# Altium PCB Secondary Protection.PcbDoc
Units mil, origin at the board's own origin, x right, y up, seen from the top; angles counter-clockwise.
Board outline 2500 x 2250 mil, 2 copper layers (Top Layer, Bottom Layer); 87 components, 69 nets, 264 pads, 67 vias.
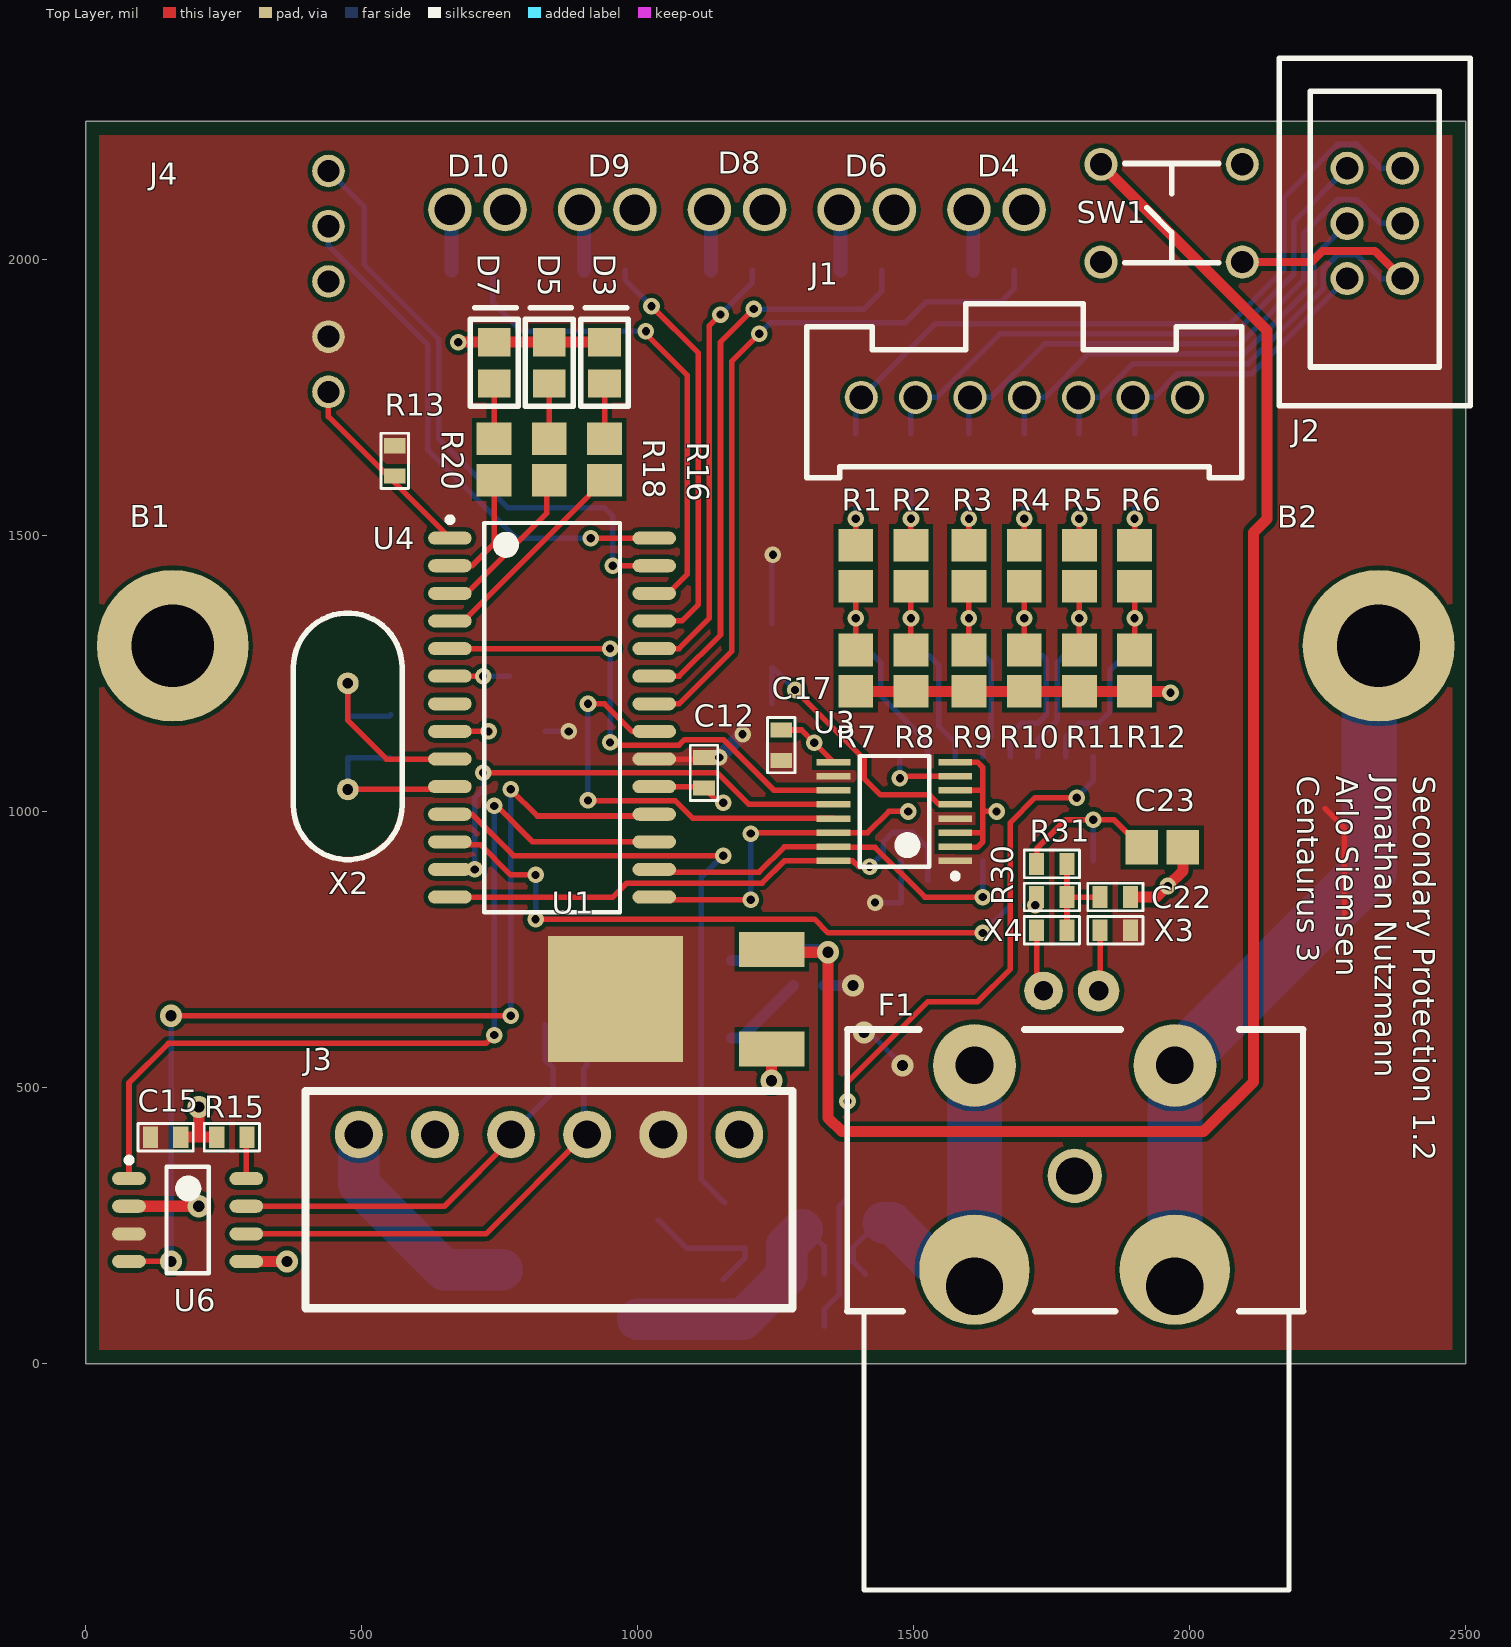
[diagram p0: Top Layer view]
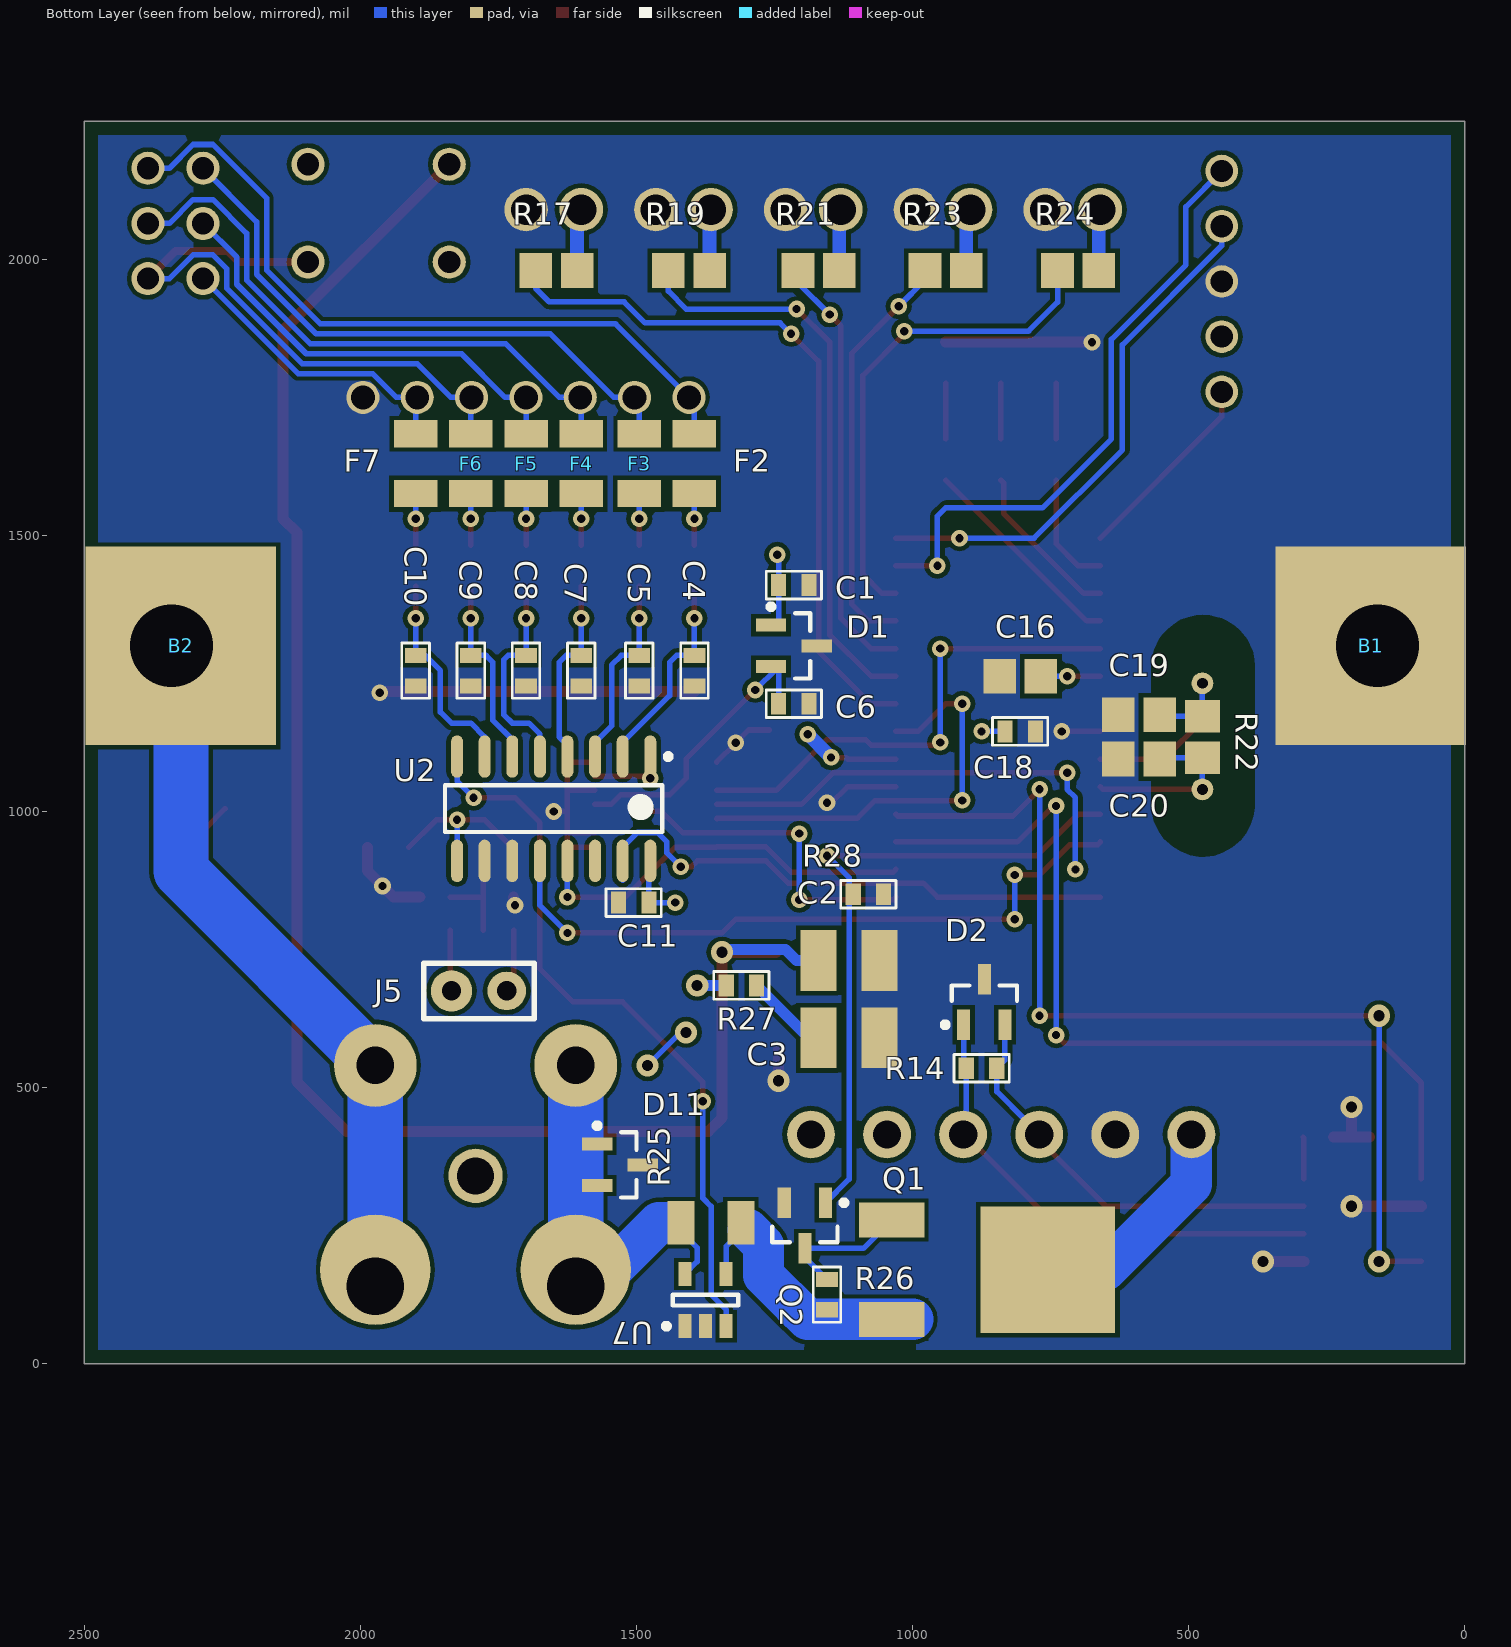
[diagram p1: Bottom Layer view, seen from below]
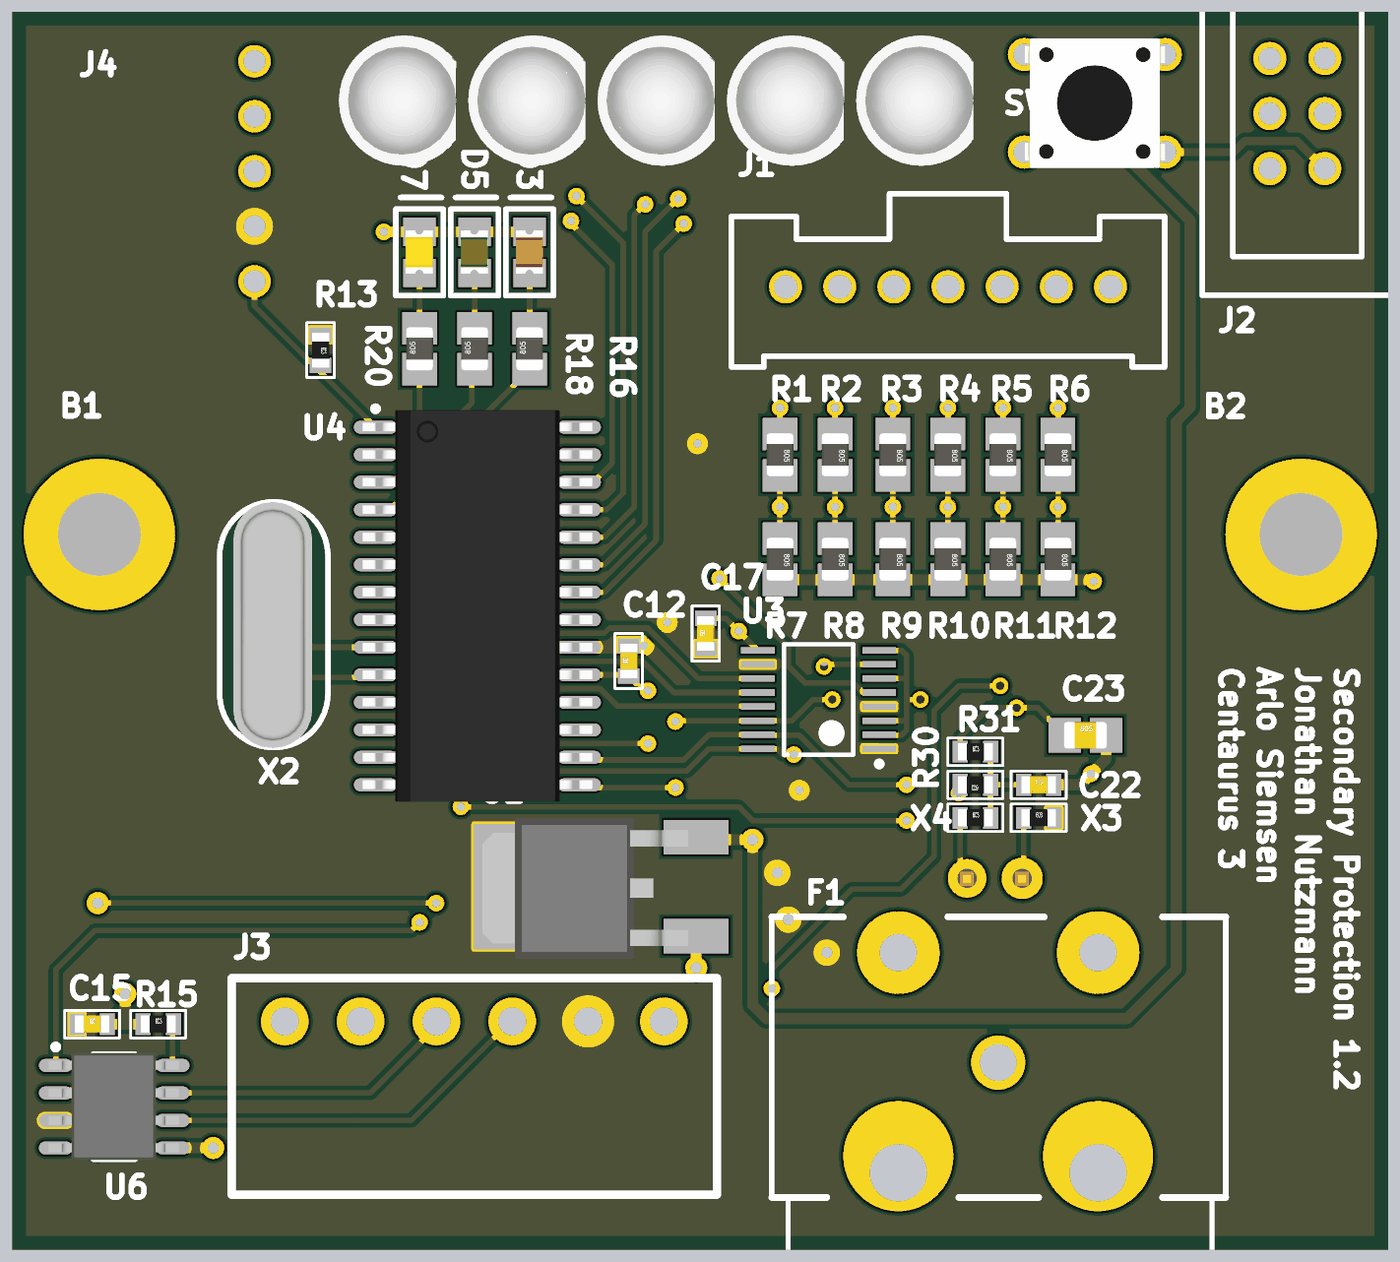
[diagram p2: 3D render of the assembled board from above, using the file's embedded part models]
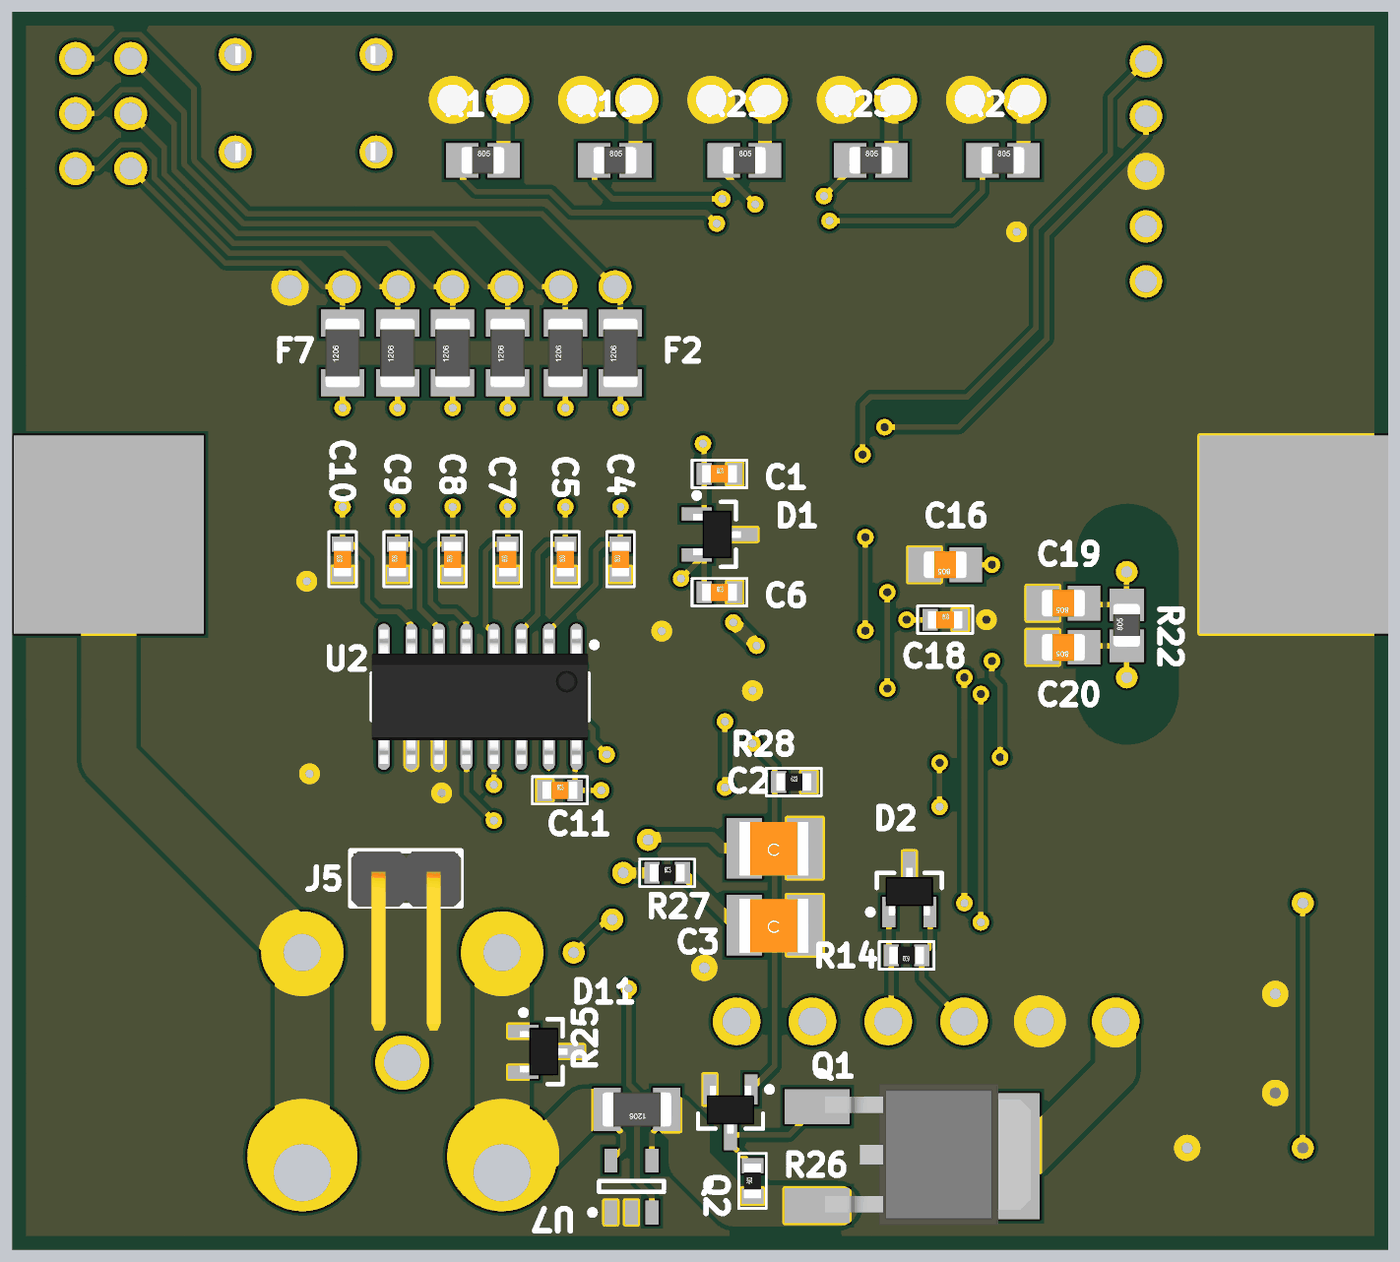
[diagram p3: 3D render of the assembled board from below, using the file's embedded part models]

## Layer stack, top to bottom
Top Layer: signal copper 1.4
Dielectric: dielectric 12.6, FR-4, Dk 4.8
Bottom Layer: signal copper 1.4

## Board outline
0,0 0,2250 2500,2250 2500,0

## Design rules (kind name [scope] priority, off if disabled: settings)
Clearance [All] p1: gap=8
HoleSize [All] p1: absolutevalues=TRUE maxlimit=500 minlimit=15 maxpercent=80.000 minpercent=20.000
MinimumSolderMaskSliver [All] p1: minsoldermaskwidth=5
PolygonConnect [All] p1: connectstyle=Direct reliefconductorwidth=10 reliefentries=4 polygonreliefangle="90 Angle"
RoutingVias [All] p1: holewidth=15 width=30 viastyle="Through Hole" minholewidth=15 minwidth=30 maxholewidth=28 maxwidth=50
SilkToSilkClearance [All] p1: silktosilkclearance=1
SilkscreenOverComponentPads [All] p1: minsilkscreentomaskgap=1
SolderMaskExpansion [All] p1: expansion=4
Width [All] p1: maxlimit=1000 minlimit=10 preferedwidth=10
24 further rules are at their usual default settings.

## Components (designator, comment, footprint, x,y, rotation, side; value= is the part's Value field where it differs from the comment)
B1 "J_C3_BATTERY_PAD" BatteryPad 170,1300 r0 top
B2 "J_C3_BATTERY_PAD" BatteryPad 2325,1300 r0 top
C1 "CAP 0603" 0603_cap 1215,1410 r180 bottom
C2 "CAP 1210" 1210_Capacitor 1115,730 r180 bottom
C3 "CAP 1210" 1210_Capacitor 1115,590 r180 bottom
C4 "CAP 0603" 0603_cap 1395,1255 r90 bottom
C5 "CAP 0603" 0603_cap 1495,1255 r90 bottom
C6 "CAP 0603" 0603_cap 1215,1195 r180 bottom
C7 "CAP 0603" 0603_cap 1600,1255 r90 bottom
C8 "CAP 0603" 0603_cap 1700,1255 r90 bottom
C9 "CAP 0603" 0603_cap 1800,1255 r90 bottom
C10 "CAP 0603" 0603_cap 1900,1255 r90 bottom
C11 "CAP 0603" 0603_cap 1505,835 r180 bottom
C12 "CAP 0603" 0603_cap 1120,1070 r90 top
C15 "CAP 0603" 0603_cap 145,410 r0 top
C16 "CAP 0805" 0805_Capacitor 805,1245 r0 bottom
C17 "CAP 0603" 0603_cap 1260,1120 r90 top
C18 "CAP 0603" 0603_cap 805,1145 r180 bottom
C19 "CAP 0805" 0805_Capacitor 590,1175 r0 bottom
C20 "CAP 0805" 0805_Capacitor 590,1095 r0 bottom
C22 "CAP 0603" 0603_cap 1865,845 r0 top
C23 "CAP 0805" 0805_Capacitor 1950,935 r0 top
D1 "IC LDO V-REF 2.048V SOT23-3" SOT-23 1215,1300 r180 bottom
D2 "CAN TVS" SOT-23 870,655 r90 bottom
D3 "D_LED_0805_RED" 0805P_RED 940,1812.6 r270 top
D4 "D_LED_5MM_GREEN" LED_5mm_GREEN 1650,2090 r0 top
D5 "D_LED_0805_GREEN" 0805P_Green 840,1812.6 r270 top
D6 "D_LED_5MM_GREEN" LED_5mm_GREEN 1415,2090 r0 top
D7 "D_LED_0805_YELLOW" 0805P_YELLOW 740,1812.6 r270 top
D8 "D_LED_5MM_GREEN" LED_5mm_GREEN 1180,2090 r0 top
D9 "D_LED_5MM_GREEN" LED_5mm_GREEN 945,2090 r0 top
D10 "D_LED_5MM_GREEN" LED_5mm_GREEN 710,2090 r0 top
D11 "D_AZ23C36-TP" SOT-23 1530,360 r180 bottom
F1 "PWR - ATO 20A" "FUSEHOLDER - AutoBlade" 1610,540 r0 top
F2 "250 mA" 1206_RESISTOR 1395,1630 r90 bottom
F3 "250 mA" 1206_RESISTOR 1495,1630 r90 bottom
F4 "250 mA" 1206_RESISTOR 1600,1630 r90 bottom
F5 "250 mA" 1206_RESISTOR 1700,1630 r90 bottom
F6 "250 mA" 1206_RESISTOR 1800,1630 r90 bottom
F7 "250 mA" 1206_RESISTOR 1900,1630 r90 bottom
J1 "DF1E 5-pin Male Header" DF1EC-7P-2.5DSA 1405,1750 r0 top
J2 "J_3x2_0.1" 6PIN_2_.100IN 2385,2165 r270 top
J3 "J_1844252" 1844252 495,415 r0 top
J4 "J_PICKIT2_5" "CONN FEMALE 5POS .100\" R/A GOLD" 440,1760 r180 top
J5 "J_Thermistor_Connector" SIP_HEADER_2 1785,675 r270 bottom
Q1 "MOSFET P-CH 30V 25A TO-252" DPAK 755,170 r0 bottom
Q2 "RK7002BT116" SOT-23 1195,250 r270 bottom
R1 "RES 0805" 0805_Resistor 1395,1445 r270 top
R2 "RES 0805" 0805_Resistor 1495,1445 r270 top
R3 "RES 0805" 0805_Resistor 1600,1445 r270 top
R4 "RES 0805" 0805_Resistor 1700,1445 r270 top
R5 "RES 0805" 0805_Resistor 1800,1445 r270 top
R6 "RES 0805" 0805_Resistor 1900,1445 r270 top
R7 "RES 0805" 0805_Resistor 1395,1255 r270 top
R8 "RES 0805" 0805_Resistor 1495,1255 r270 top
R9 "RES 0805" 0805_Resistor 1600,1255 r270 top
R10 "RES 0805" 0805_Resistor 1700,1255 r270 top
R11 "RES 0805" 0805_Resistor 1800,1255 r270 top
R12 "RES 0805" 0805_Resistor 1900,1255 r270 top
R13 "RES 0603" 0603_res 560,1635 r270 top
R14 "RES 0603" 0603_res 875,535 r0 bottom
R15 "RES 0603" 0603_res 265,410 r0 top
R16 "R_0805_620_1%" 0805_Resistor 940,1637.6 r90 top
R17 "R_0805_620_1%" 0805_Resistor 1645,1980 r180 bottom
R18 "R_0805_620_1%" 0805_Resistor 840,1637.6 r90 top
R19 "R_0805_620_1%" 0805_Resistor 1405,1980 r180 bottom
R20 "R_0805_620_1%" 0805_Resistor 740,1637.6 r90 top
R21 "R_0805_620_1%" 0805_Resistor 1170,1980 r180 bottom
R22 "RES 0805" 0805_Resistor 475,1135 r90 bottom
R23 "R_0805_620_1%" 0805_Resistor 940,1980 r180 bottom
R24 "R_0805_620_1%" 0805_Resistor 700,1980 r180 bottom
R25 "R_0805_0.01_1%" 1206_Resistor 1365,255 r0 bottom
R26 "RES 0603" 0603_res 1155,125 r90 bottom
R27 "RES 0603" 0603_res 1310,685 r180 bottom
R28 "RES 0603" 0603_res 1080,850 r180 bottom
R30 "RES 0603" 0603_res 1750,845 r180 top
R31 "RES 0603" 0603_res 1750,905 r0 top
SW1 "SW_TACT_SWITCH_6x6" TACT_SWITCH_6x6 2095,1995 r90 top
U1 "MC7805BDTG" DPAK 960,660 r0 top
U2 "U_MCP6S28-I/SL" SOIC127P600X175-16N 1650,1005 r270 bottom
U3 "U_ADS1146IPW" ADS1146IPW 1465,1000 r180 top
U4 "PIC18F25K80" SOIC127P1030X265-28N 845,1170 r0 top
U6 "U_MAX3051" SOIC127P600X175-8N 185,260 r0 top
U7 "U_ MAX9938F" SOT95P280X145-5N 1375,115 r90 bottom
X2 "HC49" HC-49 475,1040 r90 top
X3 "0603" 0603_res 1865,785 r0 top
X4 "0603" 0603_res 1750,785 r0 top

## Footprints (in the part's own frame and the unit in brackets; to place one, negate y for a bottom-side part, rotate by r counter-clockwise, add the part's x,y. Pads: shape width x height; smd on the part's side, far side on the other; paste and mask are expansions set on the pad)
6PIN_2_.100IN [mil]
  round 60 hole 40.16: 1(0,0) 2(0,-100) 3(100,0) 4(100,-100) 5(200,0) 6(200,-100)
  silkscreen extent -200,-223 430,123
0603_cap [mm]
  rect 0.7x1 smd: 1(-0.7,0) 2(0.7,0)
  silkscreen extent -1.27,-0.64 1.27,0.64, body extent -0.8,-0.4 0.8,0.4, height 0.3
0603_res [mm]
  rect 0.7x1 smd: 1(-0.7,0) 2(0.7,0)
  silkscreen extent -1.27,-0.64 1.27,0.64, body extent -0.8,-0.4 0.8,0.4, height 0.3
0805_Capacitor [mm] "0805 Capacitor"
  rect 1.5x1.6 smd: 1(-0.95,0) 2(0.95,0)
  body extent -1,-0.63 1,0.62, height 0.76
0805_Resistor [mm] "0805 Resistor"
  rect 1.5x1.6 smd: 1(-0.95,0) 2(0.95,0)
  body extent -1,-0.62 1,0.63, height 0.78
0805P_Green [mm] "Chip Capacitor; Body 2.0 x 1.2 mm (LxW typ)"
  rect 1.3x1.5 smd: 1(-0.95,0) 2(0.95,0)
  silkscreen extent -2.54,-1.1 2,1.1, body extent -1.02,-0.64 0.99,0.61, height 0.79
0805P_RED [mm] "Chip Capacitor; Body 2.0 x 1.2 mm (LxW typ)"
  rect 1.3x1.5 smd: 1(-0.95,0) 2(0.95,0)
  silkscreen extent -2.54,-1.1 2,1.1, body extent -1.02,-0.64 0.99,0.61, height 0.79
0805P_YELLOW [mm] "Chip Capacitor; Body 2.0 x 1.2 mm (LxW typ)"
  rect 1.3x1.5 smd: 1(-0.95,0) 2(0.95,0)
  silkscreen extent -2.54,-1.1 2,1.1, body extent -1.02,-0.64 0.99,0.61, height 0.79
1206_RESISTOR [mm] "1206 Resistor/Capacitor"
  rect 1.25x2 smd: 1(-1.375,0) 2(1.375,0)
  body extent -1.6,-0.8 1.6,0.8, height 1
1206_Resistor [mm] "1206 Resistor/Capacitor"
  rect 1.25x2 smd: 1(-1.375,0) 2(1.375,0)
  body extent -1.6,-0.8 1.6,0.8, height 1
1210_Capacitor [mil] "1210 Capacitor"
  rect 65x110 smd: 1(-55,0) 2(55,0)
  body extent -84,-54 82,52, height 36
1844252 [mm]
  round 2.2 hole 1.3: 1(0,0) 2(3.5,0) 3(7,0) 4(10.5,0) 5(14,0) 6(17.5,0)
  silkscreen extent -2.45,-8 19.95,2
ADS1146IPW [mm] "TSOP, 16-Leads, Body 5.1x4.5mm (max), Pitch 0.65mm, IPC Medium Density"
  rect 1.55x0.3 smd: 1(-2.8,2.275) 2(-2.8,1.625) 3(-2.8,0.975) 4(-2.8,0.325) 5(-2.8,-0.325) 6(-2.8,-0.975) 7(-2.8,-1.625) 8(-2.8,-2.275) 9(2.8,-2.275) 10(2.8,-1.625) 11(2.8,-0.975) 12(2.8,-0.325) 13(2.8,0.325) 14(2.8,0.975) 15(2.8,1.625) 16(2.8,2.275)
  silkscreen extent -2.93,-2.55 1.6,3.1, body extent -2.25,-2.55 2.25,2.55, height 1.2
BatteryPad [mil]
  rect 345x360 smd far side: 1(0,0)
"CONN FEMALE 5POS .100\" R/A GOLD" [mm] "PICKIT2 Programmer Header"
  round 1.5 hole 1.02: +5(0,-2.54) GND(0,-5.08) PGC(0,-10.16) PGD(0,-7.62) RST(0,0)
  body extent 1.6,-11.7 10.1,1.5, height 2.54
DF1EC-7P-2.5DSA [mil] "7-pin DF1E connector straight"
  round 60 hole 43.31: 1(0,0) 2(98.43,0) 3(196.85,0) 4(295.28,0) 5(393.7,0) 6(492.13,0) 7(590.55,0)
  silkscreen extent -98,-146 689,169, body extent -98,-146 689,169, height 425
DPAK [mm]
  rect 6.2x5.8 smd: 1(0,0)
  rect 3x1.6 smd: 2(7.18,2.285) 3(7.18,-2.285)
  body extent -2.69,-3.33 6.81,3.17, height 2.3
"FUSEHOLDER - AutoBlade" [mil]
  round 200 hole 104 copper offset 0,30: 1(0,-400) 2(363,-400)
  round 150 hole 68: 1(0,0) 2(363,0)
  round 98.43 hole 67 unplated: 3(181.5,-200)
  silkscreen extent -230,-950 595,65
HC-49 [mm]
  round 1 hole 0.5: 1(0,0) 2(4.88,0)
  Top Layer pour cut-out: -2.591,1.499 -2.388,1.727 -2.235,1.854 -1.981,2.057 -1.727,2.184 -1.448,2.311 -1.067,2.388 -0.787,2.413 5.766,2.413 6.172,2.337 6.579,2.21 6.909,2.032 7.239,1.778 7.595,1.372 7.849,0.914 7.976,0.533 8.026,0.127 8.026,-0.178 7.95,-0.559 7.772,-0.991 7.569,-1.346 7.188,-1.778 6.858,-2.007 6.375,-2.235 6.02,-2.311 5.588,-2.362 -0.686,-2.362 -1.016,-2.337 -1.27,-2.286 -1.502,-2.216 -1.753,-2.108 -2.007,-1.981 -2.21,-1.829 -2.438,-1.6 -2.642,-1.346 -2.87,-1.016 -2.997,-0.66 -3.073,-0.279 -3.099,0.025 -3.073,0.33 -3.023,0.584 -2.946,0.889 -2.819,1.118 -2.718,1.295
  Bottom Layer pour cut-out: 7.518,1.499 7.315,1.727 7.163,1.854 6.909,2.057 6.655,2.184 6.375,2.311 5.994,2.388 5.715,2.413 -0.838,2.413 -1.245,2.337 -1.651,2.21 -1.981,2.032 -2.311,1.778 -2.667,1.372 -2.921,0.914 -3.048,0.533 -3.099,0.127 -3.099,-0.178 -3.023,-0.559 -2.845,-0.991 -2.642,-1.346 -2.261,-1.778 -1.93,-2.007 -1.448,-2.235 -1.092,-2.311 -0.66,-2.362 5.613,-2.362 5.944,-2.337 6.198,-2.286 6.43,-2.216 6.68,-2.108 6.934,-1.981 7.137,-1.829 7.366,-1.6 7.569,-1.346 7.798,-1.016 7.925,-0.66 8.001,-0.279 8.026,0.025 8.001,0.33 7.95,0.584 7.874,0.889 7.747,1.118 7.645,1.295
  silkscreen extent -3.23,-2.5 8.11,2.5, body extent -3.25,-1.78 8.1,1.87, height 3.3
LED_5mm_GREEN [mm]
  round 2 hole 1.4: 1(-1.27,0) 2(1.27,0)
  body extent -2.96,-3.05 2.46,2.97, height 8.76
SIP_HEADER_2 [mil] "2 Pin SIP Header"
  round 70 hole 35: 1(0,50)
  round 75 hole 35: 2(0,-50)
  silkscreen extent -50,-100 50,100, body extent -49,-99 277,101, height 170
SOIC127P600X175-8N [mm] "SOIC, 8-Leads, Body 4.9x3.9mm (max), Pitch 1.27mm, IPC Medium Density"
  oval 1.55x0.6 smd: 1(-2.7,1.905) 2(-2.7,0.635) 3(-2.7,-0.635) 4(-2.7,-1.905) 5(2.7,-1.905) 6(2.7,-0.635) 7(2.7,0.635) 8(2.7,1.905)
  silkscreen extent -2.82,-2.45 0.97,2.88, body extent -3.02,-2.46 2.98,2.48, height 1.55
SOIC127P600X175-16N [mm] "SOIC, 16-Leads, Body 10.0x4.0mm (max), Pitch 1.27mm, IPC Medium Density"
  oval 1.95x0.55 smd: 1(-2.4,4.445) 2(-2.4,3.175) 3(-2.4,1.905) 4(-2.4,0.635) 5(-2.4,-0.635) 6(-2.4,-1.905) 7(-2.4,-3.175) 8(-2.4,-4.445) 9(2.4,-4.445) 10(2.4,-3.175) 11(2.4,-1.905) 12(2.4,-0.635) 13(2.4,0.635) 14(2.4,1.905) 15(2.4,3.175) 16(2.4,4.445)
  silkscreen extent -2.52,-5 1.07,5.39, body extent -3.1,-5 3.1,5, height 1.7
SOIC127P1030X265-28N [mm] "SOIC, 28-Leads, Body 17.9x7.5mm (max), Pitch 1.27mm, IPC Medium Density"
  oval 2x0.6 smd: 1(-4.7,8.255) 2(-4.7,6.985) 3(-4.7,5.715) 4(-4.7,4.445) 5(-4.7,3.175) 6(-4.7,1.905) 7(-4.7,0.635) 8(-4.7,-0.635) 9(-4.7,-1.905) 10(-4.7,-3.175) 11(-4.7,-4.445) 12(-4.7,-5.715) 13(-4.7,-6.985) 14(-4.7,-8.255) 15(4.7,-8.255) 16(4.7,-6.985) 17(4.7,-5.715) 18(4.7,-4.445) 19(4.7,-3.175) 20(4.7,-1.905) 21(4.7,-0.635) 22(4.7,0.635) 23(4.7,1.905) 24(4.7,3.175) 25(4.7,4.445) 26(4.7,5.715) 27(4.7,6.985) 28(4.7,8.255)
  silkscreen extent -4.82,-8.95 3.13,9.23, body extent -5.3,-9.05 5.3,9.05, height 2.57
SOT95P280X145-5N [mm] "SOT23, 5-Leads, Body 3.0x3.0mm (max), Pitch 0.95mm, IPC Medium Density"
  rect 1.1x0.6 smd: 1(-1.2,0.95) 2(-1.2,0) 3(-1.2,-0.95) 4(1.2,-0.95) 5(1.2,0.95)
  silkscreen extent -1.32,-1.5 0.25,1.93, body extent -0.87,-1.5 0.87,1.5, height 1.45
SOT-23 [mm] "SOT23, 3-Leads, Body 3.0x2.7mm (max), Pitch 0.95mm, IPC Medium Density"
  rect 1.4x0.6 smd: 1(-1.05,0.95) 2(-1.05,-0.95) 3(1.05,0)
  silkscreen extent -1.18,-1.5 0.76,1.92, body extent -1.21,-1.1 0.99,1.1, height 1.1
TACT_SWITCH_6x6 [mil]
  round 60 hole 40: 1(0,0) 2(177.17,255.91) 3(177.17,0) 4(0,255.91)
  silkscreen extent -1,43 179,213, body extent -29,0 207,255, height 169

## Part data
C1: library part C_0603, "CAP CER 1UF 16V 10% X7R 0603"
C2 C3: library part C_1210, "CAP CER 22UF 10V 10% X7R 1210"
C4 C5 C7 C8 C9 C10: library part C_0603, "CAP CER 1UF 50V 10% X7R 0603"
C6 C11 C12 C15 C17 C18 C22: library part C_0603, "CAP CER 0.1UF 50V 10% X7R 0603"
C16 C23: library part C_0805, "CAP CER 10UF 10V 10% X5R 0805"
C19 C20: library part C_0805, "CAP CER 22PF 50V 5% NP0 0805"
D1: library part D_REF3320AIDBZT
D2: library part D_NUP2105, "IC CAN BUS PROTECTOR DUAL SOT23"
D3: "LED 2X1.2MM 625NM RD WTR CLR SMD 0805"
D4 D6 D8 D9 D10: "LED 5MM GREEN CLEAR 527NM 15DEG"
D5: "LED 2X1.2MM 568NM GN WTR CLR SMD 0805"
D7: "LED 2X1.2MM 588NM YW WTR CLR SMD 0805"
D11: "DIODE ZENER DUAL 36V SOT-23"
F1: library part "FUSEHOLDER AutoBlade", "FUSE HOLDER ATO AUTO BLADE"
F2 F3 F4 F5 F6 F7: library part F_250mA_1206, "FUSE 250 mA 1206"
J1: library part DF1E_7_S, "7-pin Hirose"
J2: "3 x 2 0.1\" Header"
J3: library part J_1803316, "CONN HEADER RT ANG 6POS 3.5MM"
J4: "PICKIT2 PROG HEADER"
J5: "Thermistor Connector"
Q1: library part "Q_AOD417_ P-CH_-30A_-25A_DPAK", "MOSFET P-CH 30V 25A TO-252 DPAK"
Q2: library part Q_N_60V_250MA_SOT23, "MOSFET N-CH 60V 250MA SOT-23"
R1 R2 R3 R4 R5 R6: library part R_0805, "RESISTOR, 1/10W, 226K, 0.5%, 0805"
R7 R8 R9 R10 R11 R12: library part R_0805, "RESISTOR, 1/10W, 20K, 0.5%, 0805"
R13 R15 R31: library part R_0603, "RESISTOR, 1/10W, 10K, 1%, 0603"
R14: library part R_0603, "RESISTOR, 1/10W, 3.3K, 1%, 0603"
R16 R18 R20: "RESISTOR, 1/8W, 620, 1%, 0805"
R17 R19 R21 R23 R24: "RES 620 OHM 1/8W 1% 0805 SMD"
R22: library part R_0805, "RESISTOR, 1/8W, 1M, 1%, 0805"
R25: "RES CURRENT SENSE .005 OHM 1W 1%"
R26 R28: library part R_0603, "RESISTOR, 1/10W, 500K, 1%, 0603"
R27: library part R_0603
R30: library part R_0603, "RESISTOR, 1/10W, 8.2K, 1%, 0603"
SW1: "SWITCH TACT 6MM BLACK 160GF"
U1: library part U_AP1117D33G_1, "IC REG LDO BIPO 1A 3.3V TO252-3"
U2: "IC PGA 8CH R-R I/O 16SOIC"
U3: "IC ADC 16BIT SRL 2KSPS 16TSSOP"
U4: library part U_PIC18F25K80, "MCU PIC 32KB FLASH 28SOIC"
U6: "IC TXRX CAN 1MBPS 8-SOIC 3.3V"
U7: "IC AMP CURRENT SENSE SOT23-5"
X2: library part X_HC49, "CRYSTAL 8.00 MHZ 20PF 49US"
X3 X4: library part X_0603_FERRITE, "FERRITE CHIP 2A 300 OHM SMD"

## Free pads (board coordinates)
  round 275 hole 150: 0(157.99,1300) 1(2342.01,1300)

## Via types
v1: diameter 30, hole 15, Top Layer to Bottom Layer, 57 vias
v2: diameter 40, hole 20, Top Layer to Bottom Layer, 10 vias

## Nets (pads, with @x,y where several pads share a name; then routed paths per layer and width w, separated by ;. In a path a pad name is that pad's centre, name@x,y a point inside that pad or via, vN(x,y) a via of type N, cw(c..) or ccw(c..) an arc to the next point about the centre after c; other vN are vias at no path point)
2CELL: F6.2 J1.5 J2.5 SW1.1 | length 1159.1
  Top Layer w10: J1.5@1778.7,1750 J1.5@1800,1728.7
  Top Layer w15: SW1.1 2220,1995 2240,2015 2335,2015 J2.5
  Bottom Layer w10: J1.5@1798.7,1763.7 J1.5 1836.31,1750 1897.31,1811 2105.54,1811 2242,1947.46 2242,1982.81 2267.19,2008 2302.81,2008 2345.81,1965 J2.5 ; F6.2 J1.5@1800,1748.7
+2.048: C6.1 D1.2 U3.5 | length 520.6
  Top Layer w10: v1(1285,1220) 1410,1095 1410,1060 1440,1030 1528.82,1030 1546.02,1012.8 U3.5
  Bottom Layer w10: C6.1 1242.56,1260 1245,1260 v1(1285,1220)
+3.3V: C1.1 C11.2 C12.2 C15.1 C17.1 C18.1 D1.1 J3.5 J4.+5 R13.1 R27.1 U1.1 U2.16 U3.1 U3.4 U3.10 U4.20 U6.3 X3.2 | length 839.7
  Top Layer w10: U4.20 1117.44,1095 C12.2 v1@1147.84,1097.56 ; v1(1147.59,1097.81) v1@1147.84,1097.56 ; 2245,1005 2280,970 2280,815 ; v1@1147.84,1097.56 1150.4,1095 1155,1095 1152.44,1097.56 v1@1147.84,1097.56
  Bottom Layer w10: C18.1 v1(875,1145) ; v1@1189.78,1140 v1(1190,1140) ; D1.1@1242.56,1340 C1.1 1242.56,1462.56 v1(1245,1465) ; v2(1410,600) 1420,600 v2(1480,540) ; v1(1430,835) C11.2 1477.44,908.07 U2.16
  Bottom Layer w20: R27.1 v2(1390,685)
  Bottom Layer w25: v1(1147.59,1097.81) v1@1189.78,1140
+SEC: Q1.2 R25.1 R26.1 U7.4 | length 500
  Bottom Layer w10: R25.1@1325,225 1337.6,212.4 U7.4
  Bottom Layer w75: Q1.2@1000,80.04 Q1.2 1190.04,80.04 ; 1215,105 1190.04,80.04 ; R25.1@1297.93,242.07 1270,214.13 1270,160 1190.04,80.04
+SEC_OUT: J3.1 Q1.1 | length 414.2
  Bottom Layer w75: J3.1 495,325 650,170 Q1.1
ADC_DRDY: U3.13 U4.21 | length 781.2
  Top Layer w10: v1(910,1195) 940,1195 990,1145 U4.21 ; v1@915,1025 920.19,1019.81 1067.88,1019.81 1099.69,988 1353.97,988 U3.13
  Bottom Layer w10: v1(910,1020) v1(910,1195) v1@920,1195
ADC_IN: U2.1 U3.7 | length 141.4
  Top Layer w10: v1(1475,1060) 1478.98,1063.98 U3.7
  Bottom Layer w10: v1(1475,1060) U2.1
ADC_START: U3.11 U4.5 | length 908.8
  Top Layer w10: U4.5 v1(950,1295) ; v1(950,1125) 954.81,1120.19 1075.19,1120.19 1085,1130 1155,1130 1246.61,1038.39 U3.11
  Bottom Layer w10: v1(950,1125) v1(950,1295)
B1: C4.2 R1.2 R7.1 U2.2 | length 438.6
  Top Layer w10: R7.1 R1.2
  Bottom Layer w10: v1(1395,1350) C4.2 1427.44,1282.56 1440,1270 1440,1210 1525,1125 U2.2
B2: C5.2 R2.2 R8.1 U2.3 | length 417.8
  Top Layer w10: R8.1 v1(1495,1350) R2.2
  Bottom Layer w10: v1(1495,1350) C5.2 1527.44,1282.56 1545,1265 1545,1155 1575,1125 U2.3
B3: C7.2 R3.2 R9.1 U2.4 | length 404.6
  Top Layer w10: R9.1 R3.2
  Bottom Layer w10: v1(1600,1350) C7.2 1627.44,1282.56 1640,1270 1640,1135 1625,1120 U2.4
B4: C8.2 R4.2 R10.1 U2.5 | length 445.8
  Top Layer w10: R10.1 v1(1700,1350) R4.2
  Bottom Layer w10: U2.5 1675,1140 1695,1160 1725,1160 1740,1175 1740,1275 1732.44,1282.56 C8.2 v1(1700,1350)
B5: C9.2 R5.2 R11.1 U2.6 | length 412.8
  Top Layer w10: R11.1 v1(1800,1350) R5.2
  Bottom Layer w10: U2.6 1725,1130 1760,1165 1760,1270 1772.56,1282.56 C9.2 v1(1800,1350)
B6: C10.2 R6.2 R12.1 U2.7 | length 448.2
  Top Layer w10: R12.1 R6.2
  Bottom Layer w10: U2.7 1775,1135 1800,1160 1835,1160 1855,1180 1855,1255 1882.56,1282.56 C10.2 v1(1900,1350)
C\S\_ADC: U3.12 U4.13 | length 839.7
  Top Layer w10: v1(720,1070) 720.19,1069.81 1144.48,1069.81 1201.49,1012.8 U3.12
  Bottom Layer w10: v1(705,895) 705,1025 720,1040 v1(720,1070)
C\S\_OPAMP: U2.12 U4.12 | length 1231.5
  Top Layer w10: U4.12 664.96,940 715,940 770,885 v1(815,885) ; v1(815,805) 1320,805 1345,780 v1(1625,780)
  Bottom Layer w10: v1(815,805) v1(815,885) ; v1(1625,780) 1675,830 U2.12
CANH: D2.2 J3.3 R14.1 U6.7 | length 784.1
  Top Layer w10: U6.7 650,285 780,415 J3.3@795,415
  Bottom Layer w10: J3.3@795,415 795,440 847.44,492.44 R14.1 832.6,549.84 D2.2
CANL: D2.1 J3.4 R14.2 U6.6 | length 946.5
  Top Layer w10: U6.6 725,235 905,415 J3.4@945,415
  Bottom Layer w10: D2.1 907.4,539.84 R14.2 902.56,457.44 J3.4@945,415
CURR: U2.8 U7.3 | length 1330.3
  Top Layer w10: v1(1380,475) 1380,510 1525,655 1615,655 1675,715 1675,980 1720,1025 v1(1795,1025)
  Bottom Layer w10: U7.3 1337.6,97.6 1365,125 1365,284.84 1380,299.84 v1(1380,475) ; v1(1795,1025) 1825,1055 U2.8
GND: B1.1 C1.2 C2.2 C3.2 C4.1 C5.1 C6.2 C7.1 C8.1 C9.1 C10.1 C11.1 C12.1 C15.2 C16.2 C17.2 C18.2 C19.2 C20.2 C22.2 C23.2 D1.3 D2.3 D3.1 D4.2 D5.1 D6.2 D7.1 D8.2 D9.2 D10.2 D11.3 J1.7 J3.2 J4.GND pad.0 Q2.2 R7.2 R8.2 R9.2 R10.2 R11.2 R12.2 R15.1 R28.2 R30.2 U1.3 U2.10 U2.11 U3.2 U3.3 U3.6 U3.8 U3.9 U4.8 U4.19 U6.2 U6.5 U7.1 U7.2 | length 2082.3
  Top Layer w10: U4.8 v1(730,1145) ; U4.19 1117.44,1045 C12.1 1147.44,1015 1154,1015 v1(1155,1016) ; C17.2 1296.77,1147.56 v1(1320,1124.33) U3.9 ; U3.2 1576.26,935 1615,935 1625,945 1625,960 ; U3.3 1623.39,961.61 1625,960 ; U3.6 1623.39,1038.39 1625,1040 ; U3.8 1615.43,1089.57 1625,1080 1625,1040 ; v1(1650,1000) 1625,1000 ; 1625,960 1625,1000 ; 1625,1000 1625,1040
  Top Layer w20: U6.2 v2(205,285) ; C15.2 205,410 ; v2(205,465) 205,410 ; R15.1 205,410 ; U6.5 v2(365,185) ; v1(675,1850) D7.1 D5.1 D3.1 ; v2(1242.68,512.32) U1.3 ; R7.2 R8.2 R9.2 R10.2 R11.2 R12.2 1962.4,1217.6 v1(1965,1215) ; v1(1720,830) 1722.44,832.44 R30.2 ; C22.2 1940,845 v1(1960,865) 1987.4,892.4 C23.2
LED_G: R18.1 U4.3 | length 297.4
  Top Layer w10: U4.3 690,1395 835,1540 835,1595.2 R18.1
LED_R: R16.1 U4.4 | length 385.7
  Top Layer w10: U4.4 684.8,1345 R16.1
LED_Y: R20.1 U4.2 | length 211.8
  Top Layer w10: U4.2 700,1445 740,1485 R20.1
M\C\L\R\: J4.RST R13.2 U4.1 | length 356.1
  Top Layer w10: J4.RST 440,1714.96 U4.1
NetB2_1: B2.1 F1.2 pad.1 | length 1305.8
  Bottom Layer w100: F1.2@1973,140 1973,540 2325,892 B2.1
NetC2_1: C2.1 SW1.2 U1.2 | length 3197.5
  Top Layer w20: U1.2@1247.64,745 v2(1345,745) 1345,445 1370,420 2025,420 2115,510 2115,1505 2140,1530 2140,1871.26 SW1.2
  Bottom Layer w20: C2.1 1210,730 1230,750 1340,750 v2(1345,745)
NetC3_1: C3.1 R27.2 | length 151.8
  Bottom Layer w20: C3.1 1187.44,590 R27.2
NetC16_1: C16.1 U4.6 | length 107.6
  Top Layer w10: U4.6 v1(720,1245)
  Bottom Layer w10: v1(720,1245) C16.1
NetC22_1: C22.1 R30.1 R31.2 X4.2 | length 179.9
  Top Layer w10: X4.2 R30.1 ; R31.2 R30.1 ; C22.1 R30.1
NetD3_2: D3.2 R16.2 | length 100.2
  Top Layer w10: R16.2 D3.2
NetD4_2: D4.1 R17.2 | length 113.1
  Bottom Layer w25: D4.1 1607.6,2082.4 R17.2
NetD5_2: D5.2 R18.2 | length 100.2
  Top Layer w10: R18.2 D5.2
NetD6_2: D6.1 R19.2 | length 111.1
  Bottom Layer w25: D6.1 1367.6,2087.4 R19.2
NetD7_2: D7.2 R20.2 | length 100.2
  Top Layer w10: R20.2 D7.2
NetD8_2: D8.1 R21.2 | length 111.1
  Bottom Layer w25: D8.1 1132.6,2087.4 R21.2
NetD9_2: D9.1 R23.2 | length 113.1
  Bottom Layer w25: D9.1 902.6,2082.4 R23.2
NetD10_2: D10.1 R24.2 | length 111.1
  Bottom Layer w25: D10.1 662.6,2087.4 R24.2
NetD11_1: D11.1 D11.2 F1.1 R25.2 U7.5 | length 760.4
  Bottom Layer w10: U7.5 1390,184.65 1390,210 R25.2@1419.13,239.13
  Bottom Layer w50: F1.1@1575,105 F1.1@1610,140
  Bottom Layer w75: 1445,255 1460,255 F1.1@1575,140
  Bottom Layer w100: F1.1@1575,140 1610,140 F1.1@1610,540
NetF2_1: F2.1 R1.1 | length 106.5
  Top Layer w10: R1.1@1395,1495.4 R1.1 v1(1395,1530)
  Bottom Layer w10: v1(1395,1530) F2.1
NetF2_2: F2.2 J1.1 J2.1 | length 1319.7
  Bottom Layer w10: F2.2 J1.1@1395,1740 ; J1.1 1538,1883 2072.54,1883 2170,1980.46 2170,2110.81 2267.19,2208 2302.81,2208 2345.81,2165 J2.1
NetF3_1: F3.1 R2.1 | length 93.5
  Top Layer w10: R2.1 v1(1495,1530)
  Bottom Layer w10: v1(1495,1530) F3.1
NetF3_2: F3.2 J1.2 J2.2 | length 1066.6
  Bottom Layer w10: F3.2 J1.2@1495,1741.57 ; J1.2 1541.04,1750 1656.04,1865 2080,1865 2188,1973 2188,2068 J2.2
NetF4_1: F4.1 R3.1 | length 93.5
  Top Layer w10: R3.1 v1(1600,1530)
  Bottom Layer w10: v1(1600,1530) F4.1
NetF4_2: F4.2 J1.3 J2.3 | length 1062.7
  Bottom Layer w10: F4.2 J1.3@1600,1748.15 ; J1.3 1639.46,1750 1736.46,1847 2090.63,1847 2206,1962.37 2206,2046.81 2267.19,2108 2302.81,2108 2345.81,2065 J2.3
NetF5_1: F5.1 R4.1 | length 93.5
  Top Layer w10: R4.1 v1(1700,1530)
  Bottom Layer w10: v1(1700,1530) F5.1
NetF5_2: F5.2 J1.4 J2.4 | length 809.5
  Bottom Layer w10: F5.2 J1.4@1700,1749.72 ; J1.4 1737.89,1750 1816.89,1829 2098.09,1829 2224,1954.91 2224,2004 J2.4
NetF6_1: F6.1 R5.1 | length 93.5
  Top Layer w10: R5.1 v1(1800,1530)
  Bottom Layer w10: v1(1800,1530) F6.1
NetF7_1: F7.1 R6.1 | length 93.5
  Top Layer w10: R6.1 v1(1900,1530)
  Bottom Layer w10: v1(1900,1530) F7.1
NetF7_2: F7.2 J1.6 J2.6 | length 539.9
  Bottom Layer w10: J1.6 1934.74,1750 1977.74,1793 2113,1793 J2.6 ; F7.2 J1.6@1900,1747.13
NetJ5_1: J5.1 X4.1 | length 115.2
  Top Layer w10: X4.1 1722.44,687.56 J5.1
NetJ5_2: J5.2 X3.1 | length 111
  Top Layer w10: J5.2 1837.44,677.44 X3.1
NetQ1_3: Q1.3 Q2.3 R26.2 | length 251.2
  Bottom Layer w10: Q1.3 1088.98,208.66 Q2.3 1195,192.56 R26.2
NetR15_2: R15.2 U6.8 | length 75.5
  Top Layer w10: U6.8 291.3,408.74 R15.2
O\E\: Q2.1 R28.1 U4.11 | length 1189
  Top Layer w10: U4.11 700,995 775,920 v1(1155,920)
  Bottom Layer w10: v1(1155,920) 1115,880 1115,333.94 Q2.1
OSC1: C19.1 R22.2 U4.9 X2.2 | length 419.5
  Top Layer w10: X2.2 475,1165 545,1095 U4.9
  Bottom Layer w10: X2.2 R22.2 550,1172.4 C19.1
OSC2: C20.1 R22.1 U4.10 X2.1 | length 323.3
  Top Layer w10: X2.1 654.96,1040 U4.10
  Bottom Layer w10: X2.1 R22.1 550,1097.6 C20.1
PGC: J4.PGC U4.27 | length 1105.9
  Top Layer w10: v1(955,1445) U4.27
  Bottom Layer w10: J4.PGC 505,2095 505,1990 640,1855 640,1675 765,1550 940,1550 955,1535 v1(955,1445)
PGD: J4.PGD U4.28 | length 955.9
  Top Layer w10: v1(915,1495) U4.28
  Bottom Layer w10: J4.PGD 440,2025 620,1845 620,1655 780,1495 v1(915,1495)
RX: U4.18 U6.4 | length 1827.6
  Top Layer w10: U6.4 v2(155,185) ; v2(155,630) v1(770,630) ; v1(770,1040) 818.19,991.81 1026.85,991.81 U4.18
  Bottom Layer w10: v2(155,185) v2(155,630) ; v1(770,630) v1(770,1040)
SCK: U2.15 U3.16 U4.14 | length 1005
  Top Layer w10: U4.14 955,845 980.19,870.19 1225.19,870.19 1265.43,910.43 U3.16 1389.57,910.43 1400,900 v1(1420,900)
  Bottom Layer w10: v1(1420,900) 1445,925 1445,945 1461.9,961.9 1498.1,961.9 1525,935 U2.15 U2.15@1525,875
SDI: U3.14 U4.15 | length 603.6
  Top Layer w10: U4.15 1035.04,840 v1(1205,840) ; v1(1205,960) 1206.61,961.61 U3.14 1416.61,961.61 1455,1000 v1@1495,1000
  Bottom Layer w10: v1(1205,840) v1(1205,960)
  other v1: 1490,1000
SDO: U2.13 U3.15 U4.16 | length 719.1
  Top Layer w10: U4.16 1034.81,890.23 1219.77,890.23 1265.57,936.02 U3.15 1355.79,935 1430,935 1520,845 v1(1625,845)
  Bottom Layer w10: v1(1625,845) U2.13
STAT0: R17.1 U4.22 | length 1304.2
  Top Layer w10: U4.22 1075,1195 1170,1290 1170,1815 v1(1220,1865)
  Bottom Layer w10: v1(1220,1865) 1240,1885 1484.54,1885 1522.54,1923 1658,1923 1682.4,1947.4 R17.1
STAT1: R19.1 U4.23 | length 1049.3
  Top Layer w10: U4.23 1075,1245 1150,1320 1150,1850 v1(1210,1910)
  Bottom Layer w10: v1(1210,1910) 1410,1910 1442.4,1942.4 R19.1
STAT2: R21.1 U4.24 | length 784.8
  Top Layer w10: U4.24 1075,1295 1130,1350 1130,1880 v1(1150,1900)
  Bottom Layer w10: v1(1150,1900) 1207.4,1957.4 R21.1
STAT3: R23.1 U4.25 | length 752.3
  Top Layer w10: v1(1025,1915) 1110,1830 1110,1375 1080,1345 U4.25
  Bottom Layer w10: R23.1 977.4,1962.6 v1(1025,1915)
STAT4: R24.1 U4.26 | length 902.3
  Top Layer w10: v1(1015,1870) 1015,1865 1090,1790 1090,1430 1055,1395 U4.26
  Bottom Layer w10: R24.1 737.4,1922.6 790,1870 v1(1015,1870)
TEMP: C23.1 R31.1 U2.9 | length 334.6
  Top Layer w10: R31.1 1722.44,932.44 1775,985 v1(1825,985) 1862.6,985 C23.1
  Bottom Layer w10: U2.9 v1(1825,985)
TX: U4.17 U6.1 | length 1602.7
  Top Layer w10: U6.1 78.7,508.7 150,580 725,580 v1(740,595) ; v1(740,1010) 745,1010 810,945 U4.17
  Bottom Layer w10: v1(740,595) v1(740,1010)
pads on no net: F1.3 J3.6 SW1.3 SW1.4 U2.14 U4.7

## Polygon pours and split planes (outlines as drawn)
GND on Bottom Layer "Top Layer-No Net 1" (solid, remove dead copper, pour order 4): 25,2225 25,25 2475,25 2475,2225
+3.3V on Top Layer "Top Layer-No Net 1" (solid, remove dead copper, pour order 2): 25,2225 25,25 2475,25 2475,2225

## Silkscreen, mask and mechanical layers (free items; w line width, h text height)
Top Overlay:
  text "Centaurus 3" at 2195,1065 h40 r270
  text "Arlo Siemsen" at 2265,1065 h40 r270
  text "Jonathan Nutzmann" at 2335,1065 h40 r270
  text "Secondary Protection 1.2" at 2405,1065 h40 r270
Mechanical 1:
  the board outline again, w15